# EAGLE board six4mix_power_panel_stencil (EAGLE 6.6.0)

Size 104.14 x 97.79 mm. Coordinates in mm from the lower left corner, seen from the top.
Outline: 0,96.52 0,1.27 arc90 1.27,0 102.87,0 arc90 104.14,1.27 104.14,96.52 arc90 102.87,97.79 1.27,97.79 arc90 0,96.52
Copper layers (1*16): Top 0.035mm / dielectric 1.5mm / Bottom 0.035mm
Design rules "hackvana": minimum track width 6mil, minimum drill 0.3mm, track to track 6mil, track to pad 9mil, pad to pad 6mil, via to via 6mil, smd to smd 0mil, copper to edge 6mil, drill to drill 6mil, minimum pad ring 10mil, minimum via ring 6mil, stop-mask expansion 2mil, vias tented up to drill 100mil, thermal gap 10mil
Holes 2.54 mm at 6.27,3.89 96.27,3.89 6.27,93.89 96.27,93.89

## Footprints (pad centres in the part's own frame; a part is rotated, then mirrored left to right if it is on the bottom)
1X01 = drill 1.016 octagon: 1 0,0
2X5SMT = smd 3.56 x 1.27: 1 -2.54,5.08; 2 -2.54,2.54; 3 -2.54,0; 4 -2.54,-2.54; 5 -2.54,-5.08; 6 2.54,-5.08; 7 2.54,-2.54; 8 2.54,0; 9 2.54,2.54; 10 2.54,5.08

## Placement (x,y rotation side)
+1  [1X01]  3.17,35.24 0 bottom
+2  [1X01]  3.17,51.44 0 bottom
+3  [1X01]  3.17,67.63 0 bottom
+4  [1X01]  3.17,83.82 0 bottom
+5  [1X01]  28.57,19.05 0 bottom
+6  [1X01]  28.57,35.24 0 bottom
+7  [1X01]  28.57,51.44 0 bottom
+8  [1X01]  28.57,67.63 0 bottom
+9  [1X01]  28.57,83.82 0 bottom
+10  [1X01]  53.98,19.05 0 bottom
+11  [1X01]  53.98,35.24 0 bottom
+12  [1X01]  3.17,19.05 0 bottom
+13  [1X01]  53.98,51.44 0 bottom
+14  [1X01]  53.98,67.63 0 bottom
+15  [1X01]  53.98,83.82 0 bottom
+16  [1X01]  79.38,19.05 0 bottom
+17  [1X01]  79.38,35.24 0 bottom
+18  [1X01]  79.38,51.44 0 bottom
+19  [1X01]  79.38,67.63 0 bottom
+20  [1X01]  79.38,83.82 0 bottom
-1  [1X01]  3.17,37.78 0 bottom
-2  [1X01]  3.17,53.98 0 bottom
-3  [1X01]  3.17,70.17 0 bottom
-4  [1X01]  3.17,86.36 0 bottom
-5  [1X01]  28.57,21.59 0 bottom
-6  [1X01]  28.57,37.78 0 bottom
-7  [1X01]  28.57,53.98 0 bottom
-8  [1X01]  28.57,70.17 0 bottom
-9  [1X01]  28.57,86.36 0 bottom
-10  [1X01]  53.98,21.59 0 bottom
-11  [1X01]  53.98,37.78 0 bottom
-12  [1X01]  3.17,21.59 0 bottom
-13  [1X01]  53.98,53.98 0 bottom
-14  [1X01]  53.98,70.17 0 bottom
-15  [1X01]  53.98,86.36 0 bottom
-16  [1X01]  79.38,21.59 0 bottom
-17  [1X01]  79.38,37.78 0 bottom
-18  [1X01]  79.38,53.98 0 bottom
-19  [1X01]  79.38,70.17 0 bottom
-20  [1X01]  79.38,86.36 0 bottom
GND  [1X01]  3.17,16.51 0 bottom
GND1  [1X01]  3.17,32.7 0 bottom
GND2  [1X01]  3.17,48.9 0 bottom
GND3  [1X01]  3.17,65.09 0 bottom
GND4  [1X01]  3.17,81.28 0 bottom
GND5  [1X01]  28.57,16.51 0 bottom
GND6  [1X01]  28.57,32.7 0 bottom
GND7  [1X01]  28.57,48.9 0 bottom
GND8  [1X01]  28.57,65.09 0 bottom
GND9  [1X01]  28.57,81.28 0 bottom
GND10  [1X01]  53.98,16.51 0 bottom
GND11  [1X01]  53.98,32.7 0 bottom
GND12  [1X01]  53.98,48.9 0 bottom
GND13  [1X01]  53.98,65.09 0 bottom
GND14  [1X01]  53.98,81.28 0 bottom
GND15  [1X01]  79.38,16.51 0 bottom
GND16  [1X01]  79.38,32.7 0 bottom
GND17  [1X01]  79.38,48.9 0 bottom
GND18  [1X01]  79.38,65.09 0 bottom
GND19  [1X01]  79.38,81.28 0 bottom
U$1  2X5SMT  [2X5SMT]  13.97,17.15 270 top
U$2  2X5SMT  [2X5SMT]  13.97,33.34 270 top
U$3  2X5SMT  [2X5SMT]  13.97,49.53 270 top
U$4  2X5SMT  [2X5SMT]  13.97,65.72 270 top
U$5  2X5SMT  [2X5SMT]  13.97,81.92 270 top
U$6  2X5SMT  [2X5SMT]  39.37,17.15 270 top
U$7  2X5SMT  [2X5SMT]  39.37,33.34 270 top
U$8  2X5SMT  [2X5SMT]  39.37,49.53 270 top
U$9  2X5SMT  [2X5SMT]  39.37,65.72 270 top
U$10  2X5SMT  [2X5SMT]  39.37,81.92 270 top
U$11  2X5SMT  [2X5SMT]  64.77,17.15 270 top
U$12  2X5SMT  [2X5SMT]  64.77,33.34 270 top
U$13  2X5SMT  [2X5SMT]  64.77,49.53 270 top
U$14  2X5SMT  [2X5SMT]  64.77,65.72 270 top
U$15  2X5SMT  [2X5SMT]  64.77,81.92 270 top
U$16  2X5SMT  [2X5SMT]  90.17,17.15 270 top
U$17  2X5SMT  [2X5SMT]  90.17,33.34 270 top
U$18  2X5SMT  [2X5SMT]  90.17,49.53 270 top
U$19  2X5SMT  [2X5SMT]  90.17,65.72 270 top
U$20  2X5SMT  [2X5SMT]  90.17,81.92 270 top

## Library data of the parts
+1-+20 -1--20 GND GND1-GND19 = pinhead
U$1-U$20 = jason_eagle6

## Nets
GND: GND.1 U$1.2 U$1.3 U$1.4 U$1.7 U$1.8 U$1.9
GND1: GND1.1 U$2.2 U$2.3 U$2.4 U$2.7 U$2.8 U$2.9
GND2: GND2.1 U$3.2 U$3.3 U$3.4 U$3.7 U$3.8 U$3.9
GND3: GND3.1 U$4.2 U$4.3 U$4.4 U$4.7 U$4.8 U$4.9
GND4: GND4.1 U$5.2 U$5.3 U$5.4 U$5.7 U$5.8 U$5.9
GND5: GND5.1 U$6.2 U$6.3 U$6.4 U$6.7 U$6.8 U$6.9
GND6: GND6.1 U$7.2 U$7.3 U$7.4 U$7.7 U$7.8 U$7.9
GND7: GND7.1 U$8.2 U$8.3 U$8.4 U$8.7 U$8.8 U$8.9
GND8: GND8.1 U$9.2 U$9.3 U$9.4 U$9.7 U$9.8 U$9.9
GND9: GND9.1 U$10.2 U$10.3 U$10.4 U$10.7 U$10.8 U$10.9
GND10: GND10.1 U$11.2 U$11.3 U$11.4 U$11.7 U$11.8 U$11.9
GND11: GND11.1 U$12.2 U$12.3 U$12.4 U$12.7 U$12.8 U$12.9
GND12: GND12.1 U$13.2 U$13.3 U$13.4 U$13.7 U$13.8 U$13.9
GND13: GND13.1 U$14.2 U$14.3 U$14.4 U$14.7 U$14.8 U$14.9
GND14: GND14.1 U$15.2 U$15.3 U$15.4 U$15.7 U$15.8 U$15.9
GND15: GND15.1 U$16.2 U$16.3 U$16.4 U$16.7 U$16.8 U$16.9
GND16: GND16.1 U$17.2 U$17.3 U$17.4 U$17.7 U$17.8 U$17.9
GND17: GND17.1 U$18.2 U$18.3 U$18.4 U$18.7 U$18.8 U$18.9
GND18: GND18.1 U$19.2 U$19.3 U$19.4 U$19.7 U$19.8 U$19.9
GND19: GND19.1 U$20.2 U$20.3 U$20.4 U$20.7 U$20.8 U$20.9
N$1: -12.1 U$1.1 U$1.10
N$2: +12.1 U$1.5 U$1.6
N$3: -1.1 U$2.1 U$2.10
N$4: +1.1 U$2.5 U$2.6
N$5: -2.1 U$3.1 U$3.10
N$6: +2.1 U$3.5 U$3.6
N$7: -3.1 U$4.1 U$4.10
N$8: +3.1 U$4.5 U$4.6
N$9: -4.1 U$5.1 U$5.10
N$10: +4.1 U$5.5 U$5.6
N$11: -5.1 U$6.1 U$6.10
N$12: +5.1 U$6.5 U$6.6
N$13: -6.1 U$7.1 U$7.10
N$14: +6.1 U$7.5 U$7.6
N$15: -7.1 U$8.1 U$8.10
N$16: +7.1 U$8.5 U$8.6
N$17: -8.1 U$9.1 U$9.10
N$18: +8.1 U$9.5 U$9.6
N$19: -9.1 U$10.1 U$10.10
N$20: +9.1 U$10.5 U$10.6
N$21: -10.1 U$11.1 U$11.10
N$22: +10.1 U$11.5 U$11.6
N$23: -11.1 U$12.1 U$12.10
N$24: +11.1 U$12.5 U$12.6
N$25: -13.1 U$13.1 U$13.10
N$26: +13.1 U$13.5 U$13.6
N$27: -14.1 U$14.1 U$14.10
N$28: +14.1 U$14.5 U$14.6
N$29: -15.1 U$15.1 U$15.10
N$30: +15.1 U$15.5 U$15.6
N$31: -16.1 U$16.1 U$16.10
N$32: +16.1 U$16.5 U$16.6
N$33: -17.1 U$17.1 U$17.10
N$34: +17.1 U$17.5 U$17.6
N$35: -18.1 U$18.1 U$18.10
N$36: +18.1 U$18.5 U$18.6
N$37: -19.1 U$19.1 U$19.10
N$38: +19.1 U$19.5 U$19.6
N$39: -20.1 U$20.1 U$20.10
N$40: +20.1 U$20.5 U$20.6

## Tracks (layer width: path | path; a pad name or v marks a point on that pad's centre or on a via)
GND  (6 unrouted)
GND1  (6 unrouted)
GND2  (6 unrouted)
GND3  (6 unrouted)
GND4  (6 unrouted)
GND5  (6 unrouted)
GND6  (6 unrouted)
GND7  (6 unrouted)
GND8  (6 unrouted)
GND9  (6 unrouted)
GND10  (6 unrouted)
GND11  (6 unrouted)
GND12  (6 unrouted)
GND13  (6 unrouted)
GND14  (6 unrouted)
GND15  (6 unrouted)
GND16  (6 unrouted)
GND17  (6 unrouted)
GND18  (6 unrouted)
GND19  (6 unrouted)
N$1  (2 unrouted)
N$2  (2 unrouted)
N$3  (2 unrouted)
N$4  (2 unrouted)
N$5  (2 unrouted)
N$6  (2 unrouted)
N$7  (2 unrouted)
N$8  (2 unrouted)
N$9  (2 unrouted)
N$10  (2 unrouted)
N$11  (2 unrouted)
N$12  (2 unrouted)
N$13  (2 unrouted)
N$14  (2 unrouted)
N$15  (2 unrouted)
N$16  (2 unrouted)
N$17  (2 unrouted)
N$18  (2 unrouted)
N$19  (2 unrouted)
N$20  (2 unrouted)
N$21  (2 unrouted)
N$22  (2 unrouted)
N$23  (2 unrouted)
N$24  (2 unrouted)
N$25  (2 unrouted)
N$26  (2 unrouted)
N$27  (2 unrouted)
N$28  (2 unrouted)
N$29  (2 unrouted)
N$30  (2 unrouted)
N$31  (2 unrouted)
N$32  (2 unrouted)
N$33  (2 unrouted)
N$34  (2 unrouted)
N$35  (2 unrouted)
N$36  (2 unrouted)
N$37  (2 unrouted)
N$38  (2 unrouted)
N$39  (2 unrouted)
N$40  (2 unrouted)